# Altium PCB murri.PcbDoc
Units mm, origin at the board's own origin, x right, y up, seen from the top; angles counter-clockwise.
Board outline 10.25 x 20 mm, 2 copper layers (Top Layer, Bottom Layer), stack 1.536 mm thick; 10 components, 9 nets, 43 pads, 17 vias.
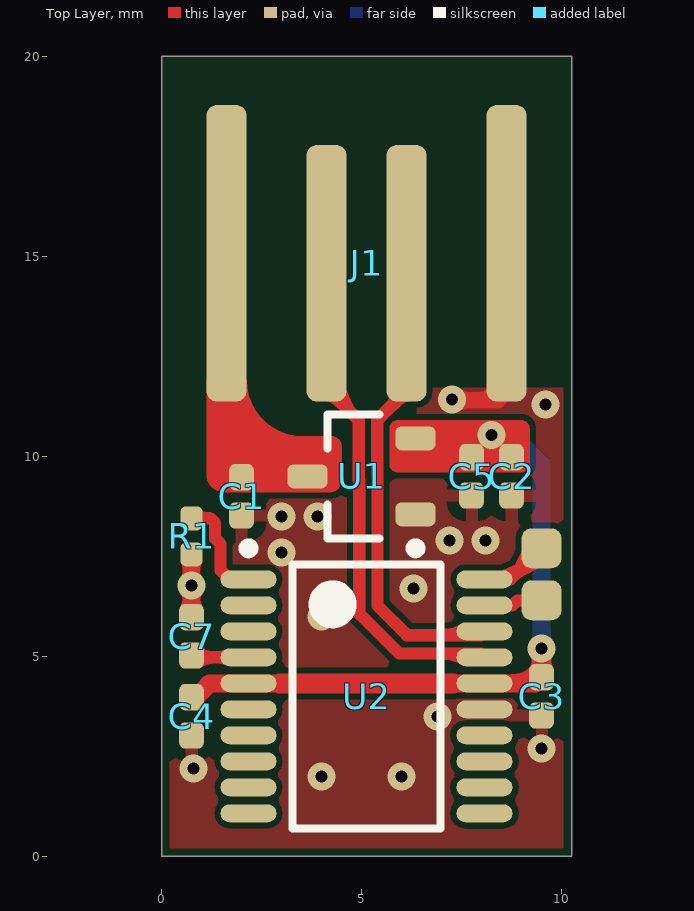
[diagram p0: Top Layer view]
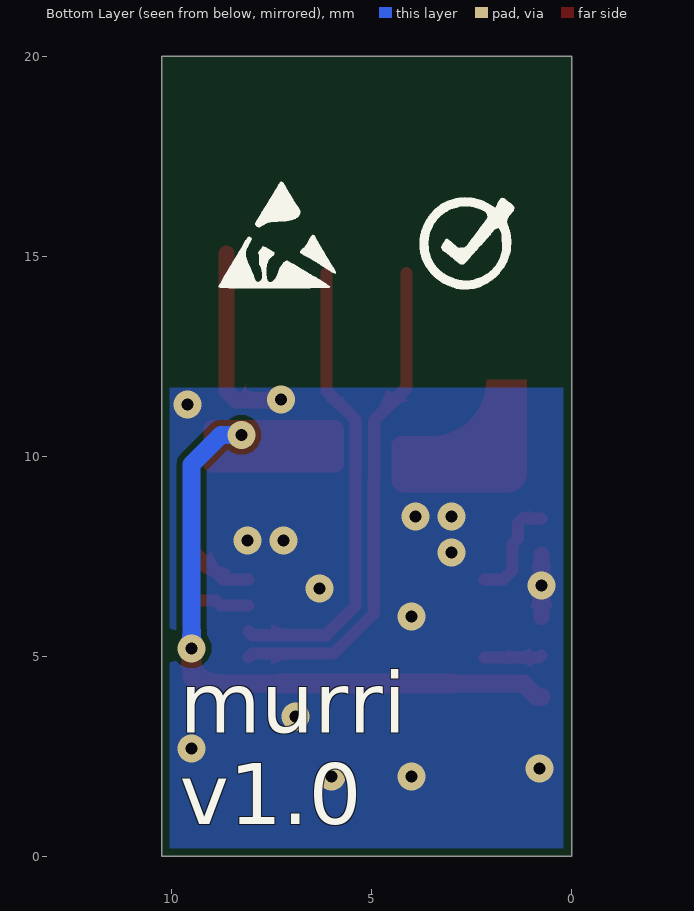
[diagram p1: Bottom Layer view, seen from below]
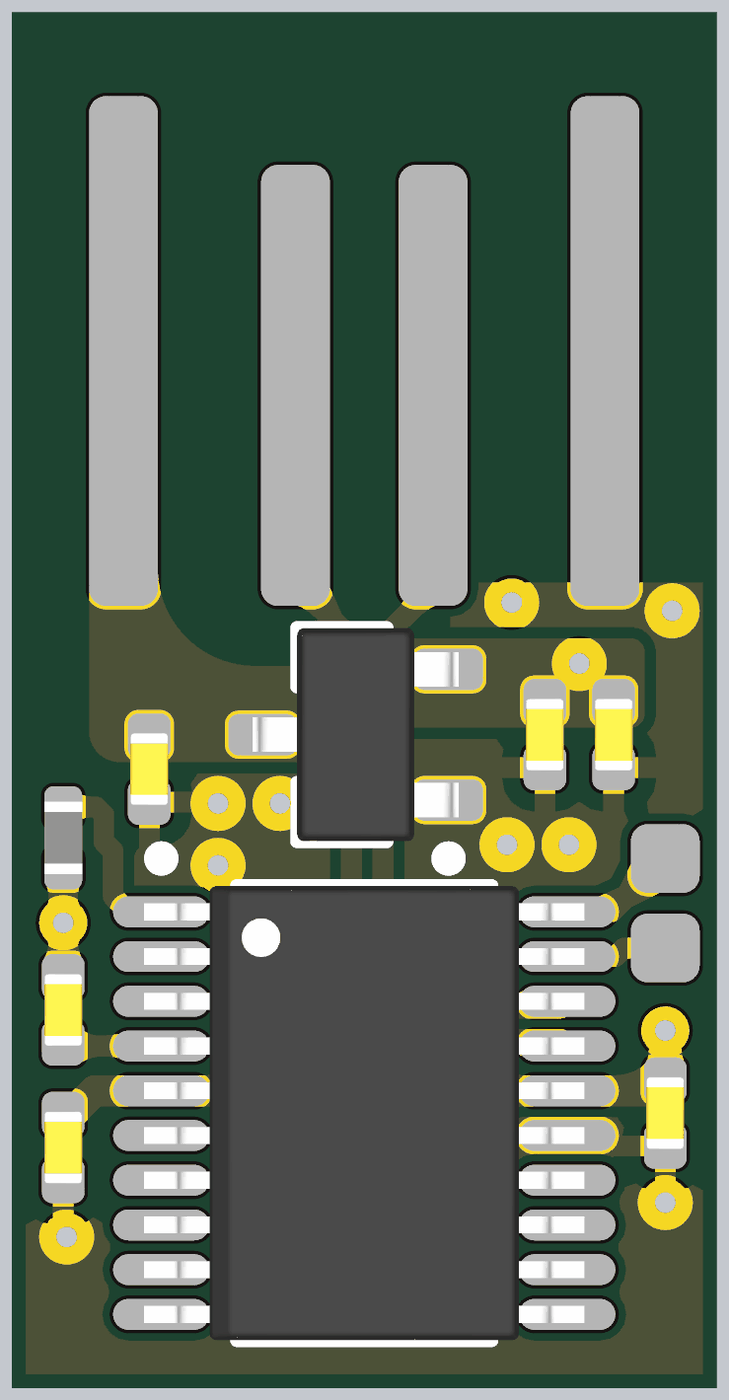
[diagram p2: 3D render of the assembled board from above, using the file's embedded part models]

## Layer stack, top to bottom
Top Solder: solder mask 0.0102, Solder Resist, Dk 3.8
Top Layer: signal copper 0.0356
Dielectric 1: dielectric 1.465, FR-4, Dk 4.6
Bottom Layer: signal copper 0.0356
Bottom Solder: solder mask 0.0102, Solder Resist, Dk 3.8

## Board outline
0,0 0,20 10.25,20 10.25,0

## Design rules (kind name [scope] priority, off if disabled: settings)
BoardOutlineClearance [All] p1: gap=0.2 ignorepadtopadclearanceinfootprint=FALSE
Clearance [All] p1: gap=0.15 ignorepadtopadclearanceinfootprint=FALSE
ComponentClearance [All] p1: gap=0 collisioncheckmode=3 verticalgap=0 showdistances=FALSE
DiffPairsRouting [All] p1: maxlimit=0.2 minlimit=0.15 mostfreqgap=0.15 toplayer_minwidth=0.31 toplayer_maxwidth=0.31 toplayer_prefwidth=0.31 bottomlayer_minwidth=0.31 bottomlayer_maxwidth=0.31 bottomlayer_prefwidth=0.31 impedanceprofiledriven=TRUE impedanceprofileid={F3010B11-AE64-4E26-B271-5D4DA7347B90} impedanceprofilevalue=90.000000 maxuncoupledlength=12.7
HoleSize [All] p1: absolutevalues=TRUE maxlimit=10 minlimit=0.2 maxpercent=80.000 minpercent=20.000
MinimumSolderMaskSliver [All] p1: minsoldermaskwidth=0.1
PolygonConnect PolygonConnect_1 [HasFootprint('C*') or HasFootprint('R*') or HasFootprint('OLED_096_SSD1306') or HasFootprint('1X6P_CONN')] p1: connectstyle=Relief reliefconductorwidth=0.3 reliefentries=4 polygonreliefangle="90 Angle" airgapwidth=0.3
PolygonConnect [All] p2: connectstyle=Direct reliefconductorwidth=0.254 reliefentries=4 polygonreliefangle="90 Angle" airgapwidth=0.254
RoutingVias [All] p1: holewidth=0.3 width=0.7 viastyle="Through Hole" minholewidth=0.3 minwidth=0.7 maxholewidth=0.3 maxwidth=0.7
SilkToSilkClearance [All] p1: silktosilkclearance=0
SilkToSolderMaskClearance [IsPad] p1: minsilkscreentomaskgap=0.15 clearancetoexposedcopper=TRUE
SolderMaskExpansion SolderMaskExpansion_1 [IsVia] p1: expansion=-0.2 istentingtop=FALSE
SolderMaskExpansion [All] p2: expansion=0.05 istentingtop=FALSE
SupplyNets "Schematic Supply Nets_2" [InNet('+3V3')] p1: voltage=0.000
SupplyNets "Schematic Supply Nets_1" [InNet('GND')] p2: voltage=0.000
SupplyNets "Schematic Supply Nets" [InNet('+5V')] p3: voltage=0.000
UnRoutedNet [All] p1: checkbadconnections=TRUE
Width [All] p1: maxlimit=1 minlimit=0.2 preferedwidth=0.2 checkconnectedcopper=TRUE
23 further rules are at their usual default settings.

## Classes and differential pairs
differential pair USB_D: +USB_D_P -USB_D_N

## Components (designator, comment, footprint, x,y, rotation, side; value= is the part's Value field where it differs from the comment)
C1 "1u" C0402 2,9 r90 top
C2 "4u7" C0402 8.75,9.5 r90 top
C3 "100n" C0402 9.5,4 r90 top
C4 "100n" C0402 0.75,3.5 r90 top
C5 "10n" C0402 7.75,9.5 r90 top
C7 "100n" C0402 0.75,5.5 r270 top
J1 "usb_2.0" USB_20 5.125,15.675 r0 top locked
R1 "1k" R0402 0.75,8 r90 top
U1 "3v3_reg" SOT23_torex 5,9.5 r180 top
U2 "STM32F042" TSSOP20_ST 5.125,4 r0 top

## Footprints (in the part's own frame and the unit in brackets; to place one, negate y for a bottom-side part, rotate by r counter-clockwise, add the part's x,y. Pads: shape width x height; smd on the part's side, far side on the other; paste and mask are expansions set on the pad)
C0402 [mm] "Chip Capacitor, 2-Leads, Body 1.00x0.50mm, IPC Medium Density"
  rrect50% 0.66x0.62 smd mask+0.05: 1(-0.48,0) 2(0.48,0)
  body extent -0.53,-0.28 0.53,0.28, height 0.55
R0402 [mm] "Chip Resistor, 2-Leads, Body 1.00x0.50mm, IPC Medium Density"
  rrect50% 0.6x0.55 smd mask+0.05: 1(-0.45,0) 2(0.45,0)
  body extent -0.53,-0.28 0.53,0.28, height 0.25
SOT23_torex [mm] "SOT23, 3-Leads, Body 2.90x2.80mm, Pitch 0.95mm, IPC Medium Density"
  rrect50% 1x0.6 smd: 1(-1.35,0.95) 2(-1.35,-0.95) 3(1.35,0)
  silkscreen extent -1.48,-1.55 0.85,1.92, body extent -1.5,-1.55 1.5,1.55, height 1.25
TSSOP20_ST [mm] "TSOP, 20-Leads, Body 6.50x4.40mm, Pitch 0.65mm, IPC Medium Density"
  oval 1.4x0.45 smd: 1(-2.95,2.925) 2(-2.95,2.275) 3(-2.95,1.625) 4(-2.95,0.975) 5(-2.95,0.325) 6(-2.95,-0.325) 7(-2.95,-0.975) 8(-2.95,-1.625) 9(-2.95,-2.275) 10(-2.95,-2.925) 11(2.95,-2.925) 12(2.95,-2.275) 13(2.95,-1.625) 14(2.95,-0.975) 15(2.95,-0.325) 16(2.95,0.325) 17(2.95,0.975) 18(2.95,1.625) 19(2.95,2.275) 20(2.95,2.925)
  silkscreen extent -3.07,-3.3 1.85,3.82, body extent -3.2,-3.3 3.2,3.3, height 1.2
USB_20 [mm] "USB 2.0 PCB footprint"
  rrect50% 1x7.41 smd: 1(-3.5,-0.6) 4(3.5,-0.6)
  rrect50% 1x6.41 smd: 2(-1,-1.1) 3(1,-1.1)

## Part data
C1 C2 C3 C4 C5 C7: library part C_0402, "0402 cap"
J1: library part USB_20, "USB 2.0 PCB"
R1: library part R_0402, "0402 62.5mW"
U1: library part XC6206P332MR-G, "200mA Fixed 3.3V Positive electrode 6V SOT-23-3L Voltage Regulators - Linear, Low Drop Out (LDO) Regulators ROHS", LCSC=C5446
U2: library part STM32F042F6P6TR, "32KB 1.65V~3.6V ARM-M0 48MHz 16 TSSOP-20(4.4x6.5) Microcontrollers (MCU/MPU/SOC) ROHS", LCSC=C2969989

## Free pads (board coordinates)
  rrect50% 1x1 smd: 3(9.5,6.4) 3(9.5,7.7)

## Via types
v1: diameter 0.7, hole 0.3, Top Layer to Bottom Layer, 17 vias

## Nets (pads, with @x,y where several pads share a name; then routed paths per layer and width w, separated by ;. In a path a pad name is that pad's centre, name@x,y a point inside that pad or via, vN(x,y) a via of type N, cw(c..) or ccw(c..) an arc to the next point about the centre after c; other vN are vias at no path point)
+3V3: C2.2 C3.2 C4.2 C5.2 U1.2 U2.5 U2.16 | length 15.8
  Top Layer w0.45: C4.2 0.86,3.98 1.205,4.325 U2.5 2.955,4.325 ; 7.295,4.325 U2.16 9.345,4.325 C3.2 v1(9.5,5.2)
  Top Layer w0.5: 2.955,4.325 7.295,4.325
  Bottom Layer w0.45: v1(8.251,10.533) 8.767,10.533 9.5,9.8 v1(9.5,5.2)
+5V: C1.2 J1.1 U1.3
GND: C1.1 C2.1 C3.1 C4.1 C5.1 C7.1 J1.4 R1.1 U1.1 U2.15 | length 6.4
  Top Layer w0.4: C7.1 v1(0.75,6.766) R1.1 ; v1@7.3,11.4 8.4,11.4 8.625,11.625 J1.4
  other v1: 4,2 6,2 0.8,2.2 9.5,2.7 6.9,3.5 4,6 6.3,6.7 3,7.6 7.2,7.9 8.1,7.9 3,8.5 3.9,8.5 9.6,11.3 7.267,11.42
NetC7_2: C7.2 U2.4 | length 1.4
  Top Layer w0.3: C7.2 0.795,4.975 U2.4
NetR1_2: R1.2 U2.1 | length 2.7
  Top Layer w0.3: R1.2 1.227,8.45 1.34,8.337 1.34,7.945 1.475,7.81 1.475,7.15 1.7,6.925 U2.1
SWCLK: pad.3@9.5,7.7 U2.20 | length 1.7
  Top Layer w0.3: U2.20 8.725,6.925 pad.3@9.5,7.7
SWDIO: pad.3@9.5,6.4 U2.19 | length 1.5
  Top Layer w0.3: U2.19 8.775,6.275 8.9,6.4 pad.3@9.5,6.4
USB_D_N: J1.2 U2.17 | length 12.4
  Top Layer w0.31: J1.2 4.125,11.71 4.935,10.9 4.935,9.4 4.94,9.395 4.94,6.074 5.075,5.939 5.944,5.07 7.98,5.07 U2.17
USB_D_P: J1.3 U2.18 | length 11.6
  Top Layer w0.31: J1.3 6.125,11.63 5.7,11.205 5.691,11.205 5.395,10.909 5.395,9.591 5.4,9.586 5.4,6.265 6.135,5.53 7.98,5.53 U2.18
pads on no net: U2.2 U2.3 U2.6 U2.7 U2.8 U2.9 U2.10 U2.11 U2.12 U2.13 U2.14

## Polygon pours and split planes (outlines as drawn)
GND on Bottom Layer "NONET_L-01_P-001" (solid, remove dead copper, pour order 0): -0.6,11.71 10.7,11.71 10.7,-0.5 -0.6,-0.5 -0.6,10.427
GND on Top Layer "NONET_L-01_P-001" (solid, remove dead copper, pour order 1): -0.6,11.71 10.7,11.71 10.7,-0.5 -0.6,-0.5 -0.6,10.427

## Other copper
Top Layer:
  region net +3V3: 5.9,9.6 cw(c5.9,9.8) 5.7,9.8 5.7,10.7 cw(c5.9,10.7) 5.9,10.9 9,10.9 cw(c9,10.7) 9.2,10.7 9.2,9.8 cw(c9,9.8) 9,9.6
  region net +5V: 4.5,9.4 cw(c4.2,9.4) 4.2,9.1 1.577,9.1 cw(c1.577,9.552) 1.125,9.552 1.125,11.911 2.125,11.913 ccw(c3.538,11.913) 3.538,10.5 4.25,10.5 cw(c4.25,10.25) 4.5,10.25

## Silkscreen, mask and mechanical layers (free items; w line width, h text height)
Bottom Overlay:
  drawing of 4 lines, arcs and shapes, not listed
  text "murri / v1.0" at 9.8,0.8 h1.52
Mechanical 1:
  the board outline again, w0.254

## Text inside footprints (layer, text, board x,y; h text height)
J1: Mechanical 1 "PCB edge" at 0.1,20.267 h0.5